# Altium PCB LIA_slave.PcbDoc
Units mil, origin at the board's own origin, x right, y up, seen from the top; angles counter-clockwise.
Board outline 6000 x 4000 mil, 2 copper layers (Top Layer, Bottom Layer); 37 components, 16 nets, 93 pads, 14 vias.
Unrouted connection lines stored in the file: 2.
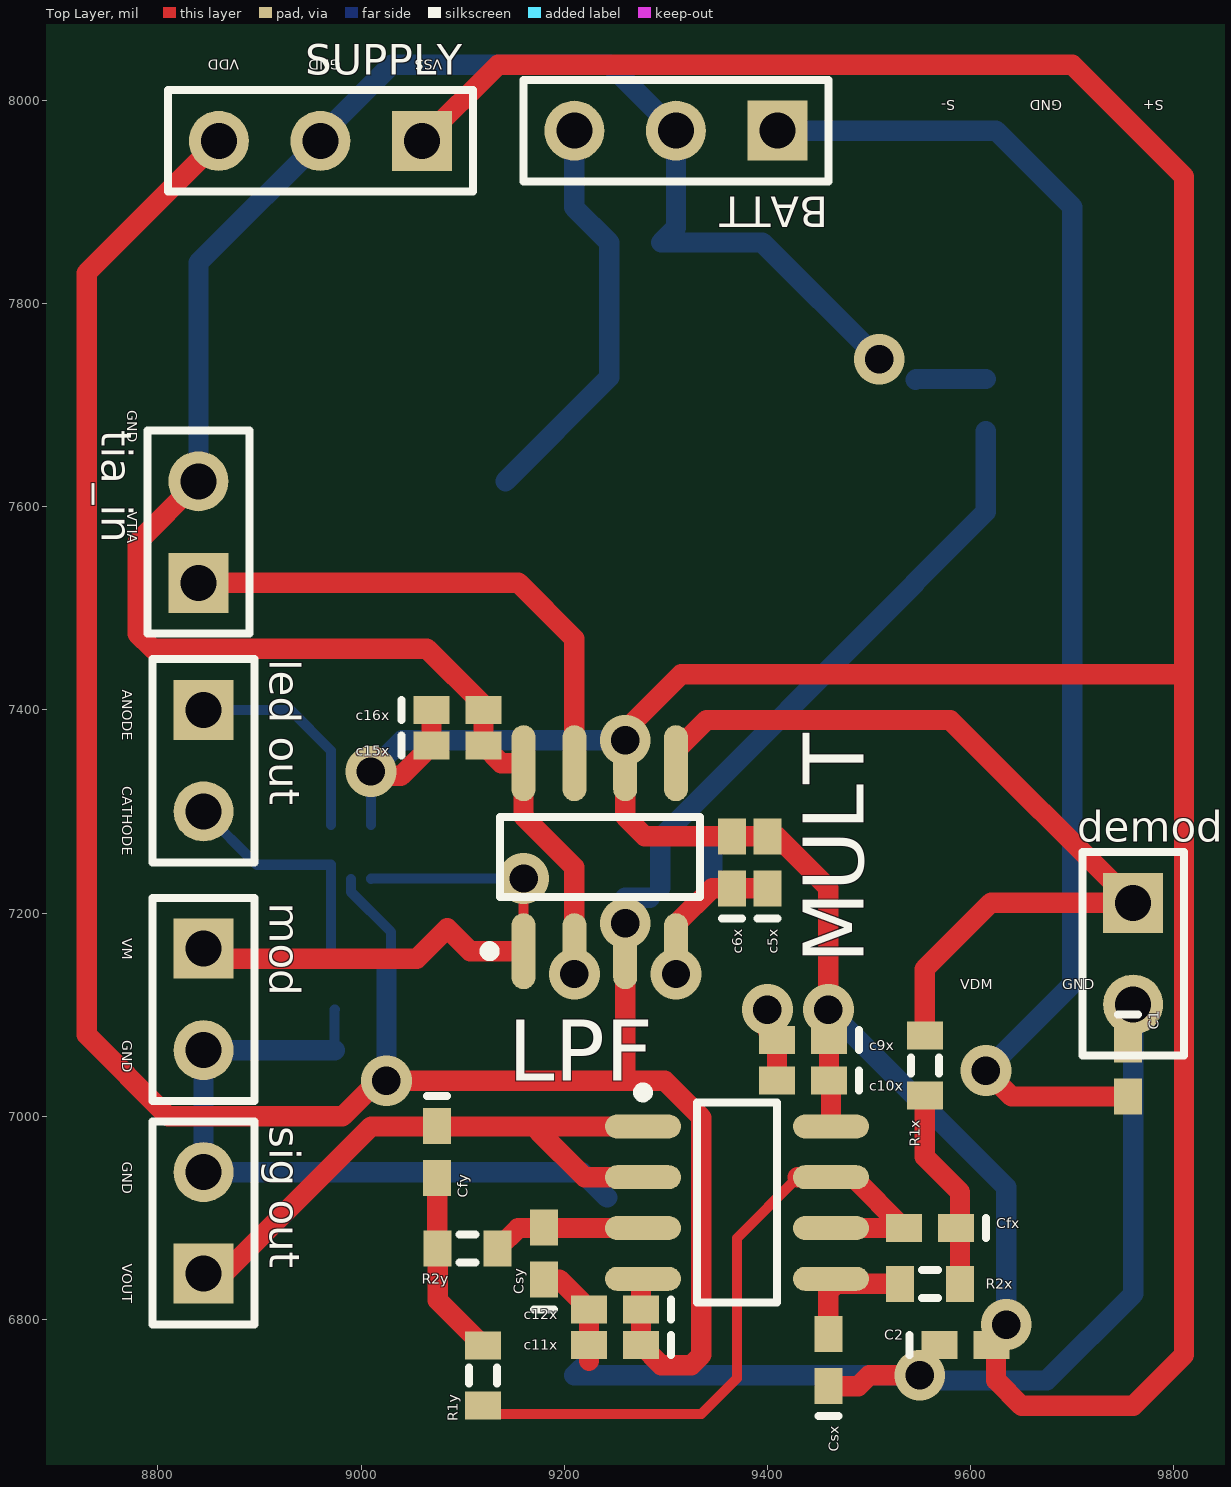
[diagram p0: Top Layer view]
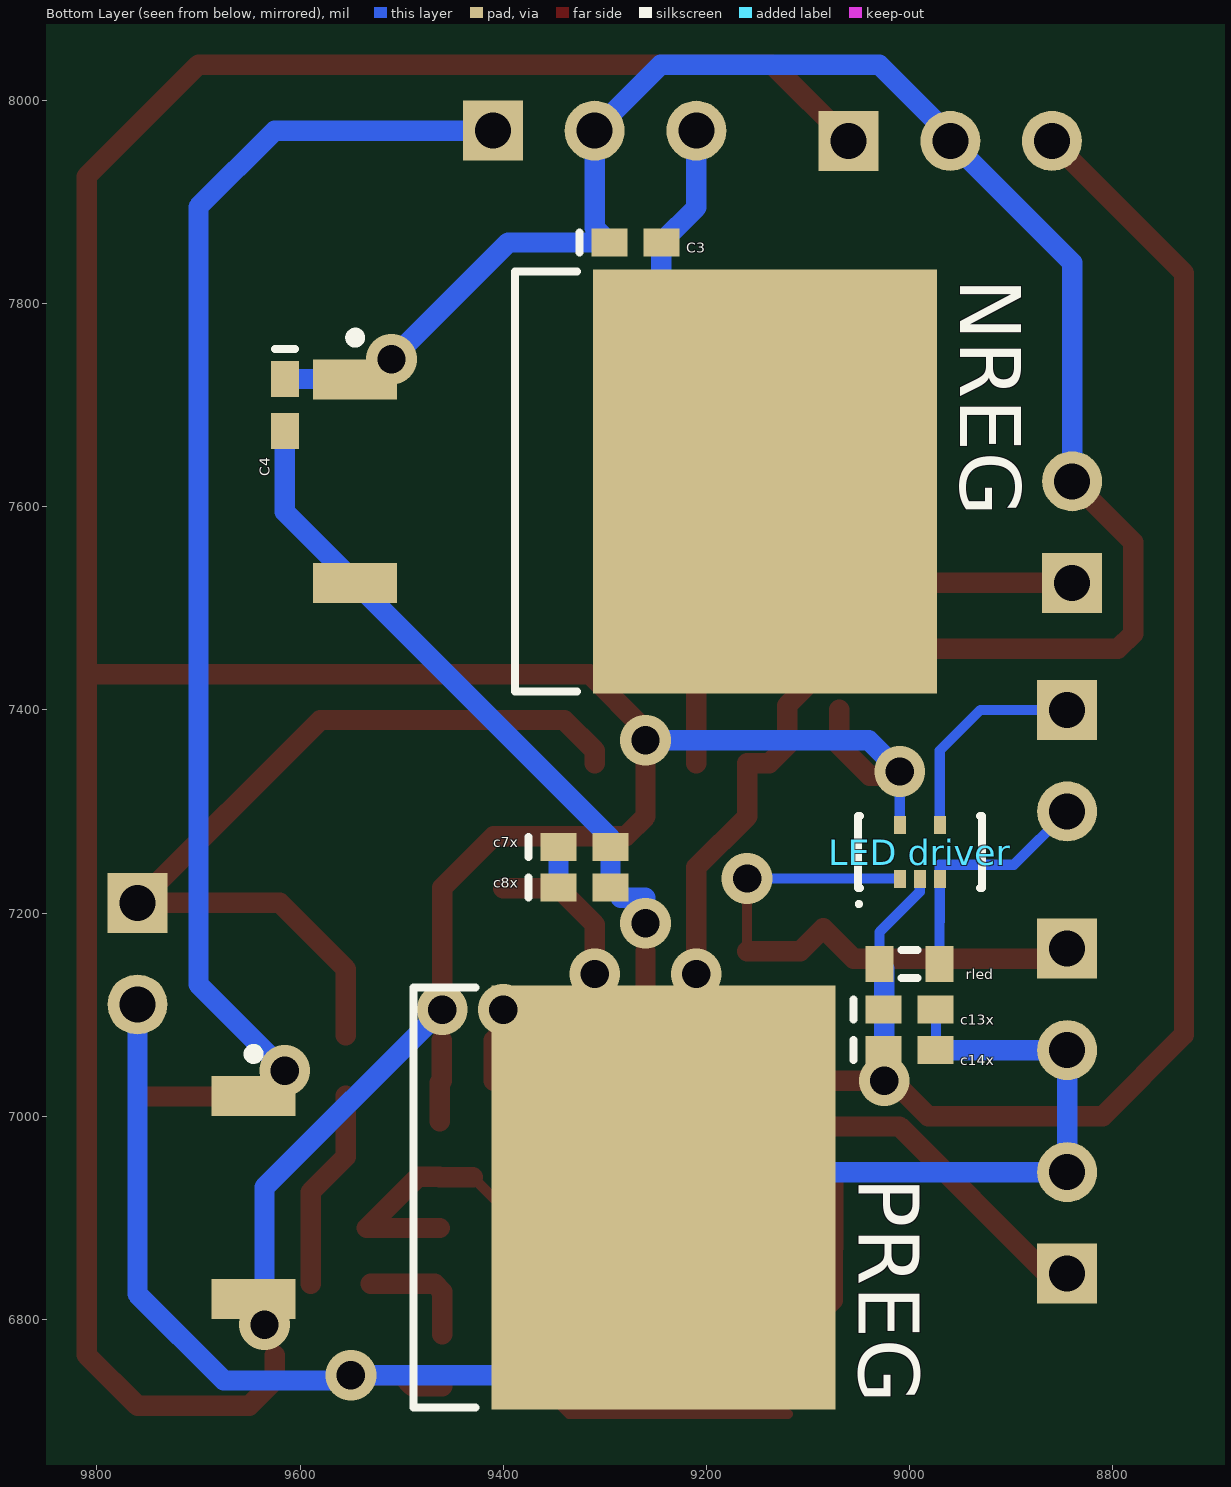
[diagram p1: Bottom Layer view, seen from below]

## Layer stack, top to bottom
Top Layer: signal copper 1.4
Dielectric: dielectric 12.6, FR-4, Dk 4.8
Bottom Layer: signal copper 1.4

## Board outline
8335,4170 14335,4170 14335,8170 8335,8170

## Design rules (kind name [scope] priority, off if disabled: settings)
Clearance [All] p1: gap=7
ComponentClearance [All] p1 off: gap=10 collisioncheckmode=3 verticalgap=10 showdistances=FALSE
Height [All] p1 off: minheight=0 maxheight=1000 prefheight=500
HoleSize [All] p1 off: absolutevalues=TRUE maxlimit=100 minlimit=1 maxpercent=80.000 minpercent=20.000
HoleToHoleClearance [All] p1 off: gap=10 allowstackedmicrovias=TRUE
LayerPairs [All] p1 off: enforce=TRUE
MinimumSolderMaskSliver [All] p1 off: minsoldermaskwidth=10
NetAntennae [All] p1 off: netantennaetolerance=0
PolygonConnect [All] p1: connectstyle=Relief reliefconductorwidth=10 reliefentries=4 polygonreliefangle="90 Angle"
RoomDefinition LIA_slave [InComponentClass('LIA_slave')] p1 off: confinementstyle=ConfineIn formatcopy=TRUE lockcomponents=FALSE outline 8720,6645 9855,6645 9855,8045 8720,8045
RoutingVias [All] p1: holewidth=28 width=50 viastyle="Through Hole" minholewidth=28 minwidth=50 maxholewidth=28 maxwidth=50
SilkToSilkClearance [All] p1 off: silktosilkclearance=10
SilkscreenOverComponentPads [All] p1 off: minsilkscreentomaskgap=10
SolderMaskExpansion [All] p1: expansion=4
Width [All] p1: maxlimit=100 minlimit=7 preferedwidth=10
19 further rules are at their usual default settings.

## Components (designator, comment, footprint, x,y, rotation, side; value= is the part's Value field where it differs from the comment)
BATT "Header 3" HDR1X3 9410,7970 r180 top
C1 "GRM155R61C225KE11D" 0402 9755,7045 r270 top
C2 "GRM155R61C225KE11D" 0402 9595,6775 r0 top
C3 "GRM155R61C225KE11D" 0402 9270,7860 r180 bottom
C4 "GRM155R61C225KE11D" 0402 9615,7700 r270 bottom
c5x "GRM155R71H392KA01D" 0402 9400,7250 r90 top
c6x "GRM155R71H102KA01D" 0402 9365,7250 r90 top
c7x "GRM155R71H392KA01D" 0402 9320,7265 r180 bottom
c8x "GRM155R71H102KA01D" 0402 9320,7225 r180 bottom
c9x "GRM155R71H392KA01D" 0402 9435,7075 r180 top
c10x "GRM155R71H102KA01D" 0402 9435,7035 r180 top
c11x "GRM155R71H392KA01D" 0402 9250,6775 r180 top
c12x "GRM155R71H102KA01D" 0402 9250,6810 r180 top
c13x "GRM155R71H392KA01D" 0402 9000,7105 r180 bottom
c14x "GRM155R71H102KA01D" 0402 9000,7065 r180 bottom
c15x "GRM155R71H392KA01D" 0402 9095,7365 r0 top
c16x "GRM155R71H102KA01D" 0402 9095,7400 r0 top
Cfx "GRM155R61A394KE15D" 0402 9560,6890 r180 top
Cfy "C1005X5R1C684K050BC" 0402 9075,6965 r270 top
Csx "GRM155R61C104KA88J" 0402 9460,6760 r90 top
Csy "GRM155R61C104KA88J" 0402 9180,6865 r90 top
demod "Header 2" HDR1X2 9760,7210 r270 top
"LED driver" "OPA171" S5 8990,7260 r180 bottom
"led out" "Header 2" HDR1X2 8845,7400 r270 top
LPF "OPA2140" D008_L 9370,6915 r0 top
mod "Header 2" HDR1X2 8845,7165 r270 top
MULT "AD633" D008_L 9235,7255 r90 top
NREG "MC7915" D2PAK_L 9280,7625 r180 bottom
PREG "MC78M15" D2PAK_L 9380,6920 r180 bottom
R1x "RC0603FR-07270KL" J1-0603 9555,7050 r270 top
R1y "RC0603FR-0757K6L" J1-0603 9120,6745 r90 top
R2x "RC0603FR-07220KL" J1-0603 9560,6835 r180 top
R2y "RC0603FR-0757K6L" J1-0603 9105,6870 r0 top
rled "RC0603FR-07100KL" J1-0603 9000,7150 r0 bottom
"sig out" "Header 2" HDR1X2 8845,6845 r90 top
SUPPLY "Header 3" HDR1X3 9060,7960 r180 top (schematic designator SUPP)
tia_in "Header 2" HDR1X2 8840,7525 r90 top

## Footprints (in the part's own frame and the unit in brackets; to place one, negate y for a bottom-side part, rotate by r counter-clockwise, add the part's x,y. Pads: shape width x height; smd on the part's side, far side on the other; paste and mask are expansions set on the pad)
0402 [mm] "Chip Capacitor; Body 1.0 x 0.5 mm (LxW typ)"
  rect 0.9x0.7 smd: 1(-0.65,0) 2(0.65,0)
  silkscreen extent -1.4,-0.25 -1.4,0.25
D2PAK_L [mm] "D2-PAK, 4-Leads, Body 8.8x10.4mm, Pitch 2.54mm, Lead Span 15.1mm, IPC High Density"
  rect 2.1x1 smd: 1(-6.75,2.54) 3(-6.75,-2.54)
  rect 8.6x10.6 smd: 2(3.5,0)
  silkscreen extent -6.88,-5.25 -1.2,5.25, body extent -2.75,-5.28 6.25,5.28, height 4.69
D008_L [mm] "8-Pin Small Outline Integrated Circuit 1.27 mm Pitch, IPC High Density"
  oval 1.9x0.6 smd: 1(-2.35,1.905) 2(-2.35,0.635) 3(-2.35,-0.635) 4(-2.35,-1.905) 5(2.35,-1.905) 6(2.35,-0.635) 7(2.35,0.635) 8(2.35,1.905)
  silkscreen extent -2.47,-2.5 1,2.88, body extent -1.95,-2.45 1.95,2.45, height 1.75
HDR1X2 [mm] "Connector; Header; 2 Position"
  rect 1.5x1.5 hole 0.9: 1(0,0)
  round 1.5 hole 0.9: 2(2.54,0)
  silkscreen extent -1.27,-1.27 3.81,1.27
HDR1X3 [mm] "Connector; Header; 3 Position"
  rect 1.5x1.5 hole 0.9: 1(0,0)
  round 1.5 hole 0.9: 2(2.54,0) 3(5.08,0)
  silkscreen extent -1.27,-1.27 6.35,1.27
J1-0603 [mm] "Chip Resistor, Body 1.6x0.8mm, IPC High Density"
  rect 0.7x0.9 smd: 1(-0.75,0) 2(0.75,0)
  silkscreen extent -0.2,-0.35 0.2,0.35, body extent -0.85,-0.48 0.85,0.48, height 0.9
S5 [mm] "SOT-23/SC-74A; 5 Leads; Body 3.1 x 3 mm, inc. leads (LxW max)"
  rect 0.3x0.45 smd: 1(-0.5,-0.675) 2(0,-0.675) 3(0.5,-0.675) 4(0.5,0.675) 5(-0.5,0.675)
  silkscreen extent -1.58,-1.35 1.55,0.9

## Part data
BATT SUPPLY: "Header, 3-Pin"
C1 C2 C3 C4 c5x c6x c7x c8x c9x c10x c11x c12x c13x c14x c15x c16x Cfx Cfy Csx Csy: library part C0402, "Ceramic Chip Capacitor - Standard"
demod "led out" mod "sig out" tia_in: "Header, 2-Pin"
"LED driver": "Single supply opamp SOT 553"
LPF: library part OPA2211, "dual channel JFET op amp"
MULT: "Analog multiplier"
NREG: "-15 V LDO regulator"
PREG: "+15 V LDO regulator"
R1x R1y R2x R2y rled: library part Res3, "Resistor"

## Via types
v1: diameter 50, hole 28, Top Layer to Bottom Layer, 14 vias

## Nets (pads, with @x,y where several pads share a name; then routed paths per layer and width w, separated by ;. In a path a pad name is that pad's centre, name@x,y a point inside that pad or via, vN(x,y) a via of type N, cw(c..) or ccw(c..) an arc to the next point about the centre after c; other vN are vias at no path point)
GND: "sig out.2" BATT.2 C1.1 C2.1 C3.1 C4.1 c5x.1 c6x.1 c7x.1 c8x.1 c9x.2 c10x.2 c11x.2 c12x.2 c13x.2 c14x.2 c15x.2 c16x.2 Csx.1 Csy.1 demod.2 mod.2 MULT.2 MULT.4 MULT.8 NREG.1 PREG.2 SUPPLY.2 tia_in.2 | length 4138.3
  Top Layer w20: tia_in.2 8780,7565 8780,7475 8795,7460 9064.95,7460 9120.59,7404.36 c16x.2 c15x.2 9138.07,7347.52 MULT.8 9160,7295 9210,7245 MULT.2 ; Csy.1 9195,6839.41 c12x.2 c11x.2 9224.41,6759.41 ; v1(9310,7140) MULT.4 9310,7188.82 9345.59,7224.41 c6x.1 c5x.1 ; v1(9400,7105) 9400,7084.41 c9x.2 c10x.2 ; Csx.1 9489.41,6734.41 9500,6745 v1(9550,6745)
  Bottom Layer w10: c14x.2@8974,7065 8974,7105 c13x.2
  Bottom Layer w20: tia_in.2 8840,7840 8970,7970 8970,7975 9030,8035 9245,8035 BATT.2 9310,7874.41 C3.1 9395,7860 v1(9510,7745) ; c14x.2@8974,7065 mod.2 v1(8845,6945) 9217.2,6945 PREG.2 ; PREG.2@9224.41,6759.41 9210,6745 v1(9550,6745) 9555,6740 9675,6740 9760,6825 demod.2 ; c8x.1 c7x.1 ; NREG.1 9546.34,7725.59 C4.1
  other v1: 9210,7140
LEDA: "LED driver.4" "led out.1" | length 215.3
  Bottom Layer w10: 8845,7400 8930.32,7400 8970.32,7360 8970.32,7286.57
LEDK: "LED driver.3" "led out.2" rled.1 | length 244.6
  Bottom Layer w10: 8845,7300 8897.53,7247.47 8970.32,7247.47 8970.32,7233.43 8970.32,7192 8970.47,7191.84 rled.1
NetCfx_1: Cfx.1 R1x.2 R2x.1 | length 199.8
  Top Layer w20: R1x.2 9555,6960 9589.53,6925.47 R2x.1
NetCfy_2: Cfy.2 R1y.2 R2y.1 | length 183.5
  Top Layer w20: Cfy.2 9075,6870.47 R2y.1 9075.47,6819.06 R1y.2
NetCsx_2: Csx.2 LPF.5 R2x.2 | length 115.5
  Top Layer w20: Csx.2 9460,6827.48 9467.52,6835 R2x.2
NetCsy_2: Csy.2 LPF.3 R2y.2 | length 151.2
  Top Layer w20: R2y.2 9154.53,6890 9180,6890 LPF.3
SUP+: BATT.1 C1.2 PREG.1 | length 1356.9
  Top Layer w20: v1(9615,7045) 9640.59,7019.41 C1.2
  Bottom Layer w20: BATT.1 9625,7970 9700,7895 9700,7130 v1(9615,7045)
SUP-: BATT.3 C3.2 NREG.2 | length 401.6
  Bottom Layer w20: NREG.2 9244.41,7727.21 C3.2 9210,7894.41 BATT.3
VDD: "LED driver.5" C2.2 c5x.2 c6x.2 c9x.1 c10x.1 c15x.1 c16x.1 LPF.8 MULT.6 PREG.3 SUPPLY.1 | length 4125
  Top Layer w20: v1@9005.37,7335 9039.41,7335 c15x.1 c16x.1 ; SUPPLY.1 9135,8035 9700,8035 9810,7925 9810,6765 9760,6715 9650,6715 9625,6740 C2.2@9625,6765 ; v1(9460,7105) 9460,7225 9409.41,7275.59 c5x.2 c6x.2 9279.41,7275.59 9260,7295 MULT.6 v1(9260,7370) 9260,7380 9315,7435 9810,7435 ; c9x.1 c10x.1 9462.52,7033.07 LPF.8@9462.52,6995
  Bottom Layer w10: 9009.69,7286.57 v1(9009.69,7339.31)
  Bottom Layer w20: v1(9009.69,7339.31) 9040.37,7370 v1(9260,7370) ; v1(9460,7105) 9635,6930 v1(9635,6795)
VDM: demod.1 MULT.5 R1x.1 | length 846.9
  Top Layer w20: MULT.5 9310,7360 9340,7390 9580,7390 demod.1 9620,7210 9555,7145 R1x.1
VM: "LED driver.1" mod.1 MULT.1 | length 569.2
  Top Layer w10: MULT.1 v1(9160,7234)
  Top Layer w20: mod.1 8845,7155 9055,7155 9085,7185 9107.52,7162.48 MULT.1
  Bottom Layer w10: 9009.69,7233.43 9009.69,7234 v1(9160,7234)
VOUT: "sig out.1" Cfy.1 LPF.1 LPF.2 | length 609.3
  Top Layer w20: 8845,6845 8865,6845 9010,6990 9175,6990 ; LPF.1@9268.07,6990 9175,6990 ; LPF.2 9220,6940 9175,6985 9175,6990
VS1: Cfx.2 LPF.6 LPF.7 R1y.1 | length 684.8
  Top Layer w10: R1y.1@9120,6707 9335,6707 9370,6742 9370,6880 LPF.7@9430,6940
  Top Layer w20: LPF.7@9430,6940 LPF.7 9463.11,6940.59 9483.82,6940.59 Cfx.2 LPF.6
VSS: "LED driver.2" C4.2 c7x.2 c8x.2 c11x.1 c12x.1 c13x.1 c14x.1 LPF.4 MULT.3 NREG.3 rled.2 SUPPLY.3 | length 2952.2
  Top Layer w20: SUPPLY.3 8730,7830 8730,7080 8810,7000 8981.82,7000 9016.82,7035 v1(9025,7035) 9255,7035 ; MULT.3 9260,7040 9255,7035 ; LPF.4 9275.59,6840 c12x.1 c11x.1 9295.59,6755 9325,6755 9335,6765 9335,6998.82 9298.82,7035 9255,7035
  Bottom Layer w10: 8990,7233.43 8990,7221 9029.53,7181.47 rled.2 rled.2@9025,7145.47
  Bottom Layer w20: v1(9025,7035) rled.2@9025,7145.47 ; v1(9260,7190) 9260,7215 c8x.2@9284.41,7215 ; c8x.2 c7x.2 9294.41,7273.66 NREG.3 ; NREG.3@9545,7525 9615,7595 C4.2
VTIA: MULT.7 tia_in.1 | length 515.3
  Top Layer w20: tia_in.1 9155,7525 9210,7470 MULT.7

## Silkscreen, mask and mechanical layers (free items; w line width, h text height)
Top Overlay:
  text "VDD" at 8880,8040 h10 r180
  text "GND" at 8980,8040 h10 r180
  text "VSS" at 9080,8040 h10 r180
  text "S-" at 9585,8000 h10 r180
  text "GND" at 9690,8000 h10 r180
  text "S+" at 9790,8000 h10 r180
  text "GND" at 8770,7695 h10 r270
  text "VTIA" at 8770,7595 h10 r270
  text "ANODE" at 8765,7420 h10 r270
  text "CATHODE" at 8765,7325 h10 r270
  text "VM" at 8765,7175 h10 r270
  text "VDM" at 9590,7125 h10
  text "GND" at 9690,7125 h10
  text "GND" at 8765,7075 h10 r270
  text "GND" at 8765,6955 h10 r270
  text "VOUT" at 8765,6855 h10 r270